# EAGLE board CAN Transceiver-Panel (EAGLE 9.0.1)
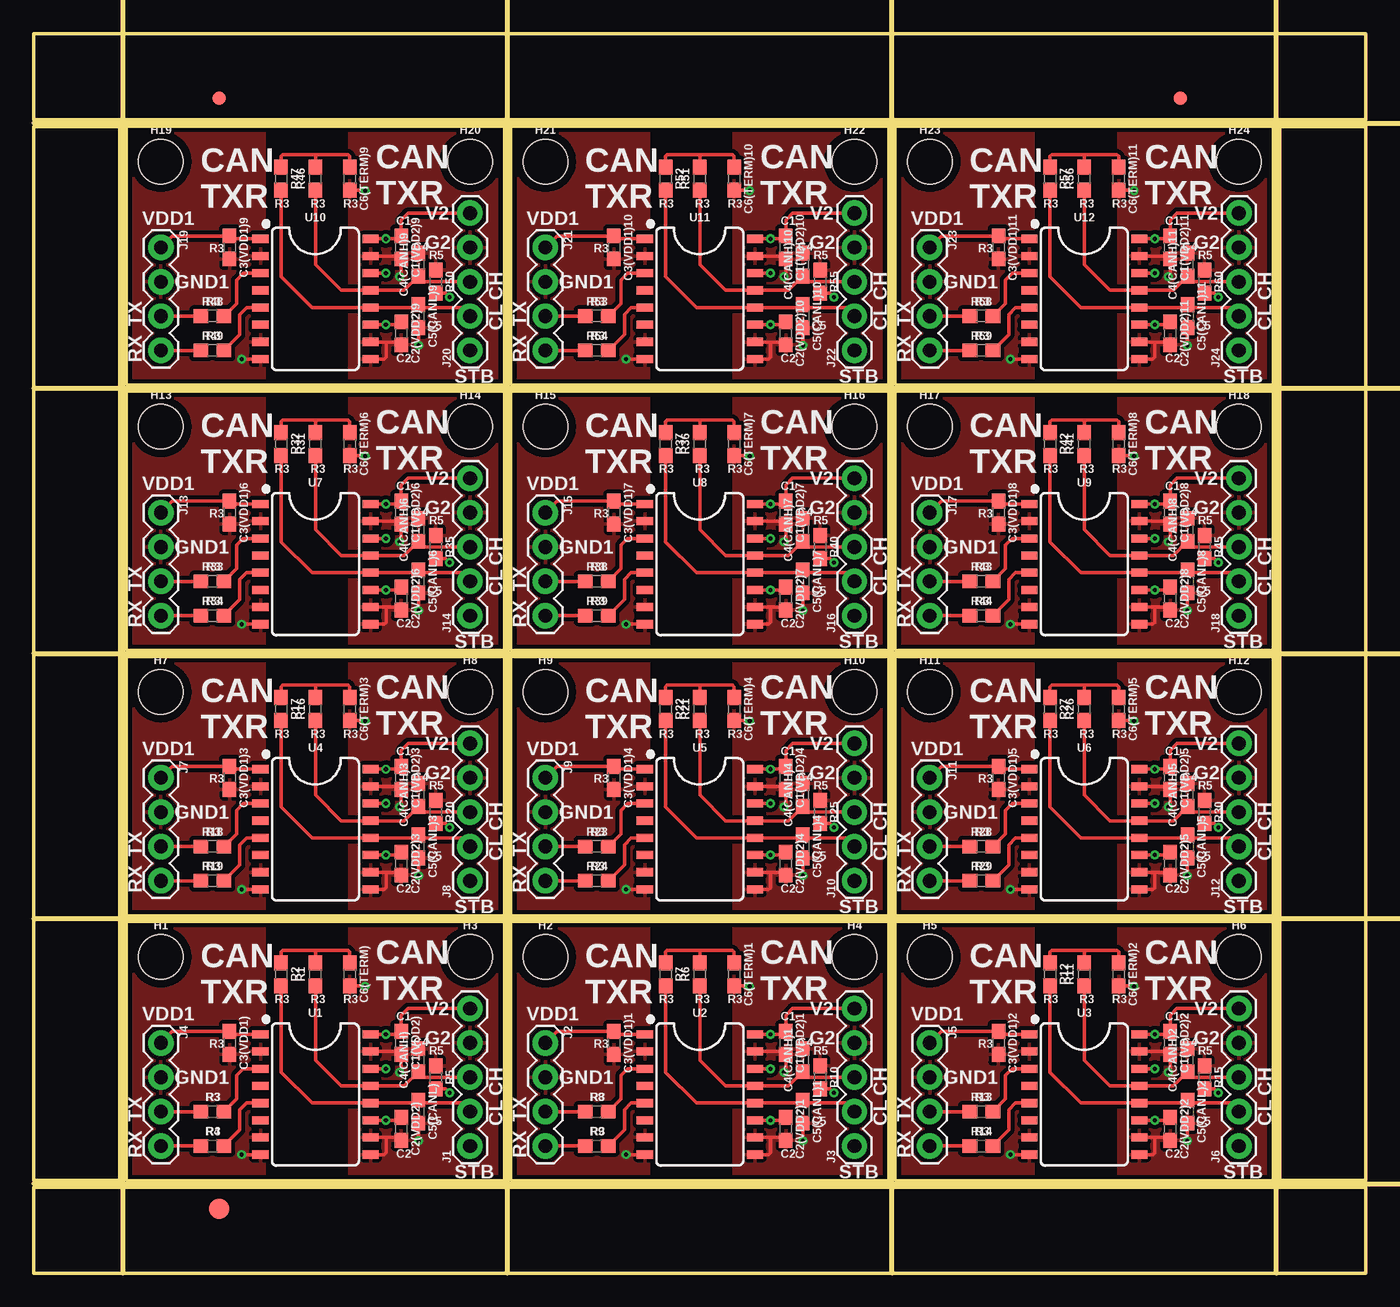
[diagram p0: board, top side]
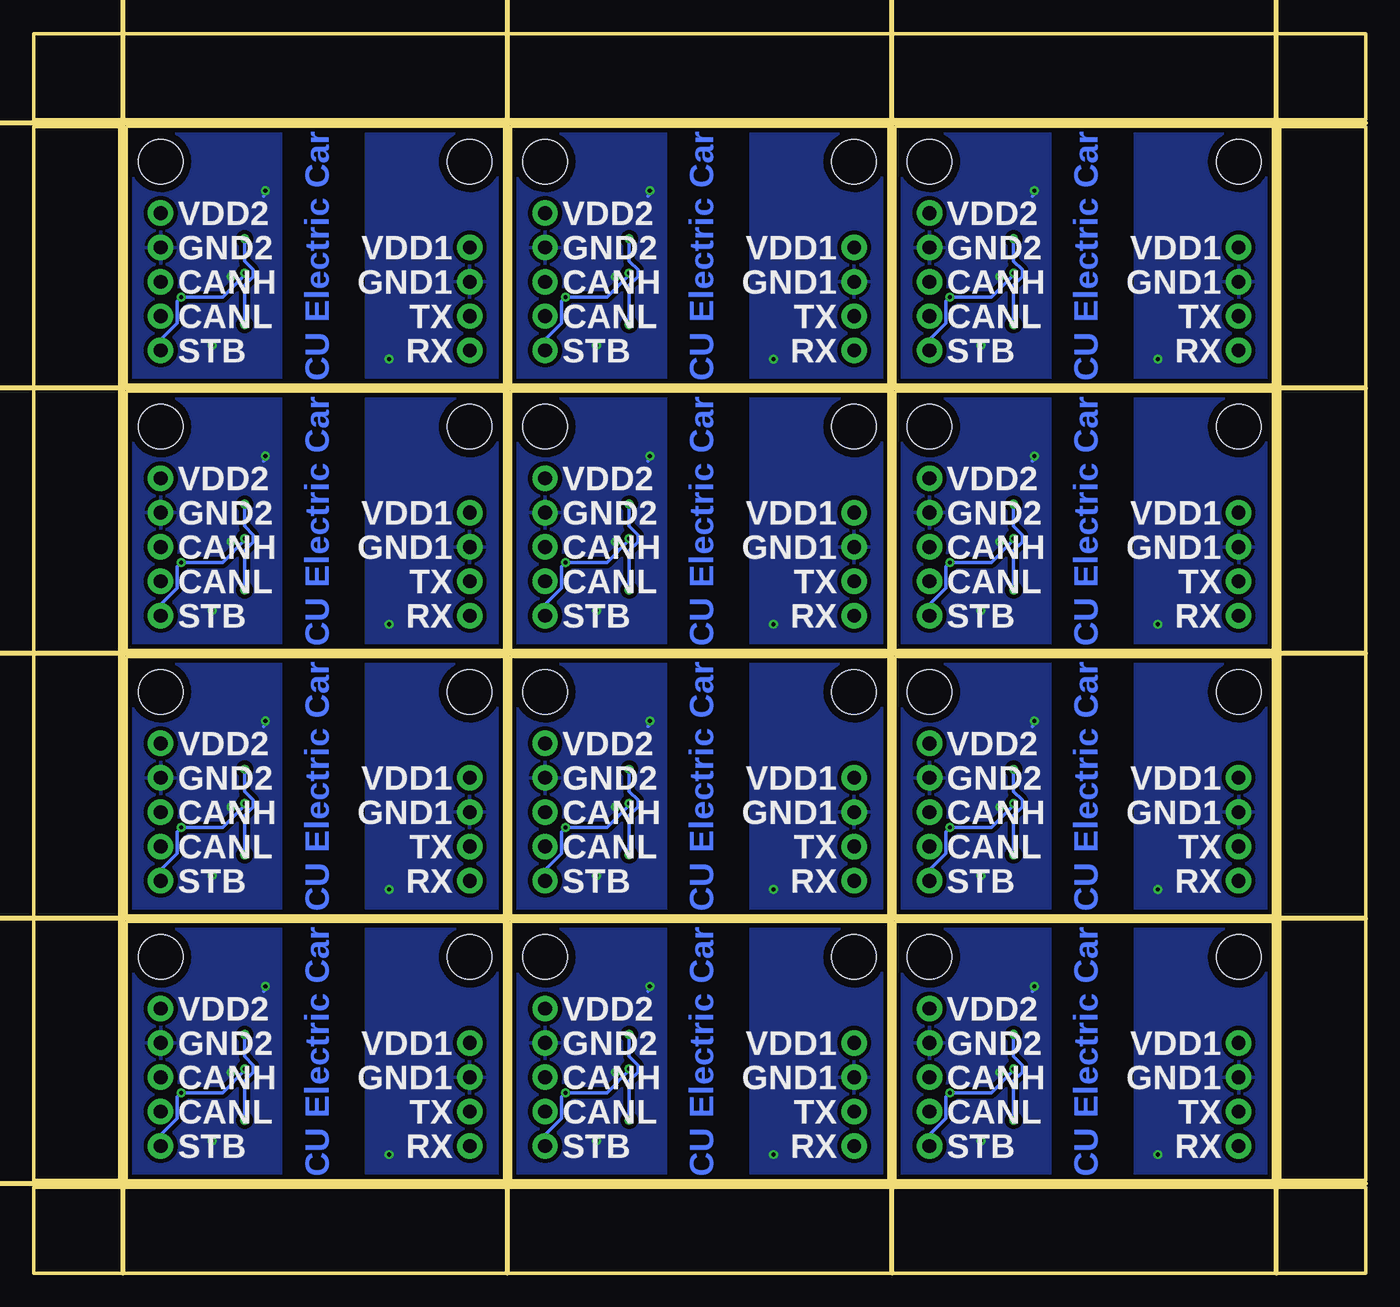
[diagram p1: board, bottom side, seen from below]

Size 98.49 x 91.64 mm. Coordinates in mm from the lower left corner, seen from the top.
Outline: 6.86,6.86 34.78,6.86 34.78,25.96 6.86,25.96 6.86,6.86
Outline: 35.29,6.86 63.21,6.86 63.21,25.96 35.29,25.96 35.29,6.86
Outline: 63.71,6.86 91.63,6.86 91.63,25.96 63.71,25.96 63.71,6.86
Outline: 6.86,26.47 34.78,26.47 34.78,45.57 6.86,45.57 6.86,26.47
Outline: 35.29,26.47 63.21,26.47 63.21,45.57 35.29,45.57 35.29,26.47
Outline: 63.71,26.47 91.63,26.47 91.63,45.57 63.71,45.57 63.71,26.47
Outline: 6.86,46.08 34.78,46.08 34.78,65.18 6.86,65.18 6.86,46.08
Outline: 35.29,46.08 63.21,46.08 63.21,65.18 35.29,65.18 35.29,46.08
Outline: 63.71,46.08 91.63,46.08 91.63,65.18 63.71,65.18 63.71,46.08
Outline: 6.86,65.69 34.78,65.69 34.78,84.79 6.86,84.79 6.86,65.69
Outline: 35.29,65.69 63.21,65.69 63.21,84.79 35.29,84.79 35.29,65.69
Outline: 63.71,65.69 91.63,65.69 91.63,84.79 63.71,84.79 63.71,65.69
Outline: 0,6.35 98.49,6.35 98.49,0 0,0 0,6.35
Outline: 92.14,84.79 98.49,84.79 98.49,6.86 92.14,6.86 92.14,84.79
Outline: 0,91.64 98.49,91.64 98.49,85.29 0,85.29 0,91.64
Outline: 0,84.79 6.35,84.79 6.35,6.86 0,6.86 0,84.79
Copper layers (1*16): Top 0.035mm / dielectric 1.5mm / Bottom 0.035mm
Design rules "SparkFun-2-layer-PCBWay-LIMIT": minimum track width 6mil, minimum drill 0.3mm, track to track 6mil, track to pad 6mil, pad to pad 6mil, via to via 6mil, smd to smd 6mil, copper to edge 6mil, drill to drill 6mil, minimum pad ring 7mil, minimum via ring 7mil, stop-mask expansion 4mil, vias tented up to drill 25mil, thermal gap 10mil
tRestrict: 24 lines
Milling: 9 lines

## Footprints (pad centres in the part's own frame; a part is rotated, then mirrored left to right if it is on the bottom)
0603 = smd 1.1 x 1: 1 -0.85,0; 2 0.85,0
FIDUCIAL-1X2 = smd 1 x 1: 1 0,0
FIDUCIAL-1.5X3 = smd 1.5 x 1.5: 1 0,0
STAND-OFF = hole 3.302: 0,0
1X05 = drill 1.016 pad 1.88: 1 0,0; 2 2.54,0; 3 5.08,0; 4 7.62,0; 5 10.16,0
1X04 = drill 1.016 pad 1.88: 1 0,0; 2 2.54,0; 3 5.08,0; 4 7.62,0
SO16 = smd 0.6 x 1.2: 1 -4.445,-4.07; 2 -3.175,-4.07; 3 -1.905,-4.07; 4 -0.635,-4.07; 5 0.635,-4.07; 6 1.905,-4.07; 7 3.175,-4.07; 8 4.445,-4.07; 9 4.445,4.07; 10 3.175,4.07; 11 1.905,4.07; 12 0.635,4.07; 13 -0.635,4.07; 14 -1.905,4.07; 15 -3.175,4.07; 16 -4.445,4.07

## Placement (x,y rotation side)
C1(VDD2)  0.1uF  [0603]  27.18,17.02 270 top
C1(VDD2)1  0.1uF  [0603]  55.61,17.02 270 top
C1(VDD2)2  0.1uF  [0603]  84.03,17.02 270 top
C1(VDD2)3  0.1uF  [0603]  27.18,36.63 270 top
C1(VDD2)4  0.1uF  [0603]  55.61,36.63 270 top
C1(VDD2)5  0.1uF  [0603]  84.03,36.63 270 top
C1(VDD2)6  0.1uF  [0603]  27.18,56.24 270 top
C1(VDD2)7  0.1uF  [0603]  55.61,56.24 270 top
C1(VDD2)8  0.1uF  [0603]  84.03,56.24 270 top
C1(VDD2)9  0.1uF  [0603]  27.18,75.85 270 top
C1(VDD2)10  0.1uF  [0603]  55.61,75.85 270 top
C1(VDD2)11  0.1uF  [0603]  84.03,75.85 270 top
C2(VDD2)  0.1uF  [0603]  27.18,10.67 270 top
C2(VDD2)1  0.1uF  [0603]  55.61,10.67 270 top
C2(VDD2)2  0.1uF  [0603]  84.03,10.67 270 top
C2(VDD2)3  0.1uF  [0603]  27.18,30.28 270 top
C2(VDD2)4  0.1uF  [0603]  55.61,30.28 270 top
C2(VDD2)5  0.1uF  [0603]  84.03,30.28 270 top
C2(VDD2)6  0.1uF  [0603]  27.18,49.89 270 top
C2(VDD2)7  0.1uF  [0603]  55.61,49.89 270 top
C2(VDD2)8  0.1uF  [0603]  84.03,49.89 270 top
C2(VDD2)9  0.1uF  [0603]  27.18,69.5 270 top
C2(VDD2)10  0.1uF  [0603]  55.61,69.5 270 top
C2(VDD2)11  0.1uF  [0603]  84.03,69.5 270 top
C3(VDD1)  0.1uF  [0603]  14.48,17.02 270 top
C3(VDD1)1  0.1uF  [0603]  42.91,17.02 270 top
C3(VDD1)2  0.1uF  [0603]  71.33,17.02 270 top
C3(VDD1)3  0.1uF  [0603]  14.48,36.63 270 top
C3(VDD1)4  0.1uF  [0603]  42.91,36.63 270 top
C3(VDD1)5  0.1uF  [0603]  71.33,36.63 270 top
C3(VDD1)6  0.1uF  [0603]  14.48,56.24 270 top
C3(VDD1)7  0.1uF  [0603]  42.91,56.24 270 top
C3(VDD1)8  0.1uF  [0603]  71.33,56.24 270 top
C3(VDD1)9  0.1uF  [0603]  14.48,75.85 270 top
C3(VDD1)10  0.1uF  [0603]  42.91,75.85 270 top
C3(VDD1)11  0.1uF  [0603]  71.33,75.85 270 top
C4(CANH)  63pF  [0603]  28.45,15.75 90 top
C4(CANH)1  63pF  [0603]  56.88,15.75 90 top
C4(CANH)2  63pF  [0603]  85.3,15.75 90 top
C4(CANH)3  63pF  [0603]  28.45,35.36 90 top
C4(CANH)4  63pF  [0603]  56.88,35.36 90 top
C4(CANH)5  63pF  [0603]  85.3,35.36 90 top
C4(CANH)6  63pF  [0603]  28.45,54.97 90 top
C4(CANH)7  63pF  [0603]  56.88,54.97 90 top
C4(CANH)8  63pF  [0603]  85.3,54.97 90 top
C4(CANH)9  63pF  [0603]  28.45,74.58 90 top
C4(CANH)10  63pF  [0603]  56.88,74.58 90 top
C4(CANH)11  63pF  [0603]  85.3,74.58 90 top
C5(CANL)  63pF  [0603]  28.45,11.94 270 top
C5(CANL)1  63pF  [0603]  56.88,11.94 270 top
C5(CANL)2  63pF  [0603]  85.3,11.94 270 top
C5(CANL)3  63pF  [0603]  28.45,31.55 270 top
C5(CANL)4  63pF  [0603]  56.88,31.55 270 top
C5(CANL)5  63pF  [0603]  85.3,31.55 270 top
C5(CANL)6  63pF  [0603]  28.45,51.16 270 top
C5(CANL)7  63pF  [0603]  56.88,51.16 270 top
C5(CANL)8  63pF  [0603]  85.3,51.16 270 top
C5(CANL)9  63pF  [0603]  28.45,70.77 270 top
C5(CANL)10  63pF  [0603]  56.88,70.77 270 top
C5(CANL)11  63pF  [0603]  85.3,70.77 270 top
C6(TERM)  4.7nF  [0603]  23.37,22.1 270 top
C6(TERM)1  4.7nF  [0603]  51.8,22.1 270 top
C6(TERM)2  4.7nF  [0603]  80.22,22.1 270 top
C6(TERM)3  4.7nF  [0603]  23.37,41.71 270 top
C6(TERM)4  4.7nF  [0603]  51.8,41.71 270 top
C6(TERM)5  4.7nF  [0603]  80.22,41.71 270 top
C6(TERM)6  4.7nF  [0603]  23.37,61.32 270 top
C6(TERM)7  4.7nF  [0603]  51.8,61.32 270 top
C6(TERM)8  4.7nF  [0603]  80.22,61.32 270 top
C6(TERM)9  4.7nF  [0603]  23.37,80.93 270 top
C6(TERM)10  4.7nF  [0603]  51.8,80.93 270 top
C6(TERM)11  4.7nF  [0603]  80.22,80.93 270 top
E$1  [FIDUCIAL-1X2]  13.72,86.88 0 top
E$2  [FIDUCIAL-1X2]  84.78,86.88 0 top
E$3  [FIDUCIAL-1.5X3]  13.72,4.76 0 top
H1  STAND-OFF  [STAND-OFF]  9.4,23.37 0 top
H2  STAND-OFF  [STAND-OFF]  37.83,23.37 0 top
H3  STAND-OFF  [STAND-OFF]  32.26,23.37 0 top
H4  STAND-OFF  [STAND-OFF]  60.69,23.37 0 top
H5  STAND-OFF  [STAND-OFF]  66.25,23.37 0 top
H6  STAND-OFF  [STAND-OFF]  89.11,23.37 0 top
H7  STAND-OFF  [STAND-OFF]  9.4,42.98 0 top
H8  STAND-OFF  [STAND-OFF]  32.26,42.98 0 top
H9  STAND-OFF  [STAND-OFF]  37.83,42.98 0 top
H10  STAND-OFF  [STAND-OFF]  60.69,42.98 0 top
H11  STAND-OFF  [STAND-OFF]  66.25,42.98 0 top
H12  STAND-OFF  [STAND-OFF]  89.11,42.98 0 top
H13  STAND-OFF  [STAND-OFF]  9.4,62.59 0 top
H14  STAND-OFF  [STAND-OFF]  32.26,62.59 0 top
H15  STAND-OFF  [STAND-OFF]  37.83,62.59 0 top
H16  STAND-OFF  [STAND-OFF]  60.69,62.59 0 top
H17  STAND-OFF  [STAND-OFF]  66.25,62.59 0 top
H18  STAND-OFF  [STAND-OFF]  89.11,62.59 0 top
H19  STAND-OFF  [STAND-OFF]  9.4,82.2 0 top
H20  STAND-OFF  [STAND-OFF]  32.26,82.2 0 top
H21  STAND-OFF  [STAND-OFF]  37.83,82.2 0 top
H22  STAND-OFF  [STAND-OFF]  60.69,82.2 0 top
H23  STAND-OFF  [STAND-OFF]  66.25,82.2 0 top
H24  STAND-OFF  [STAND-OFF]  89.11,82.2 0 top
J1  [1X05]  32.26,9.4 90 top
J2  [1X04]  37.83,17.02 270 top
J3  [1X05]  60.69,9.4 90 top
J4  [1X04]  9.4,17.02 270 top
J5  [1X04]  66.25,17.02 270 top
J6  [1X05]  89.11,9.4 90 top
J7  [1X04]  9.4,36.63 270 top
J8  [1X05]  32.26,29.01 90 top
J9  [1X04]  37.83,36.63 270 top
J10  [1X05]  60.69,29.01 90 top
J11  [1X04]  66.25,36.63 270 top
J12  [1X05]  89.11,29.01 90 top
J13  [1X04]  9.4,56.24 270 top
J14  [1X05]  32.26,48.62 90 top
J15  [1X04]  37.83,56.24 270 top
J16  [1X05]  60.69,48.62 90 top
J17  [1X04]  66.25,56.24 270 top
J18  [1X05]  89.11,48.62 90 top
J19  [1X04]  9.4,75.85 270 top
J20  [1X05]  32.26,68.23 90 top
J21  [1X04]  37.83,75.85 270 top
J22  [1X05]  60.69,68.23 90 top
J23  [1X04]  66.25,75.85 270 top
J24  [1X05]  89.11,68.23 90 top
R1  [0603]  20.83,22.1 90 top
R2  [0603]  18.29,22.1 270 top
R3  [0603]  13.21,11.94 0 top
R4  [0603]  13.21,9.4 0 top
R5  10k  [0603]  29.72,14.48 270 top
R6  [0603]  49.26,22.1 90 top
R7  [0603]  46.72,22.1 270 top
R8  [0603]  41.64,11.94 0 top
R9  [0603]  41.64,9.4 0 top
R10  10k  [0603]  58.15,14.48 270 top
R11  [0603]  77.68,22.1 90 top
R12  [0603]  75.14,22.1 270 top
R13  [0603]  70.06,11.94 0 top
R14  [0603]  70.06,9.4 0 top
R15  10k  [0603]  86.57,14.48 270 top
R16  [0603]  20.83,41.71 90 top
R17  [0603]  18.29,41.71 270 top
R18  [0603]  13.21,31.55 0 top
R19  [0603]  13.21,29.01 0 top
R20  10k  [0603]  29.72,34.09 270 top
R21  [0603]  49.26,41.71 90 top
R22  [0603]  46.72,41.71 270 top
R23  [0603]  41.64,31.55 0 top
R24  [0603]  41.64,29.01 0 top
R25  10k  [0603]  58.15,34.09 270 top
R26  [0603]  77.68,41.71 90 top
R27  [0603]  75.14,41.71 270 top
R28  [0603]  70.06,31.55 0 top
R29  [0603]  70.06,29.01 0 top
R30  10k  [0603]  86.57,34.09 270 top
R31  [0603]  20.83,61.32 90 top
R32  [0603]  18.29,61.32 270 top
R33  [0603]  13.21,51.16 0 top
R34  [0603]  13.21,48.62 0 top
R35  10k  [0603]  29.72,53.7 270 top
R36  [0603]  49.26,61.32 90 top
R37  [0603]  46.72,61.32 270 top
R38  [0603]  41.64,51.16 0 top
R39  [0603]  41.64,48.62 0 top
R40  10k  [0603]  58.15,53.7 270 top
R41  [0603]  77.68,61.32 90 top
R42  [0603]  75.14,61.32 270 top
R43  [0603]  70.06,51.16 0 top
R44  [0603]  70.06,48.62 0 top
R45  10k  [0603]  86.57,53.7 270 top
R46  [0603]  20.83,80.93 90 top
R47  [0603]  18.29,80.93 270 top
R48  [0603]  13.21,70.77 0 top
R49  [0603]  13.21,68.23 0 top
R50  10k  [0603]  29.72,73.31 270 top
R51  [0603]  49.26,80.93 90 top
R52  [0603]  46.72,80.93 270 top
R53  [0603]  41.64,70.77 0 top
R54  [0603]  41.64,68.23 0 top
R55  10k  [0603]  58.15,73.31 270 top
R56  [0603]  77.68,80.93 90 top
R57  [0603]  75.14,80.93 270 top
R58  [0603]  70.06,70.77 0 top
R59  [0603]  70.06,68.23 0 top
R60  10k  [0603]  86.57,73.31 270 top
U1  TJA1052I  [SO16]  20.83,13.21 270 top
U2  TJA1052I  [SO16]  49.26,13.21 270 top
U3  TJA1052I  [SO16]  77.68,13.21 270 top
U4  TJA1052I  [SO16]  20.83,32.82 270 top
U5  TJA1052I  [SO16]  49.26,32.82 270 top
U6  TJA1052I  [SO16]  77.68,32.82 270 top
U7  TJA1052I  [SO16]  20.83,52.43 270 top
U8  TJA1052I  [SO16]  49.26,52.43 270 top
U9  TJA1052I  [SO16]  77.68,52.43 270 top
U10  TJA1052I  [SO16]  20.83,72.04 270 top
U11  TJA1052I  [SO16]  49.26,72.04 270 top
U12  TJA1052I  [SO16]  77.68,72.04 270 top

## Library data of the parts
C1(VDD2) C1(VDD2)1-C1(VDD2)11 C2(VDD2) C2(VDD2)1-C2(VDD2)11 C3(VDD1) C3(VDD1)1-C3(VDD1)11 = SparkFun-Capacitors; PROD_ID: CAP-00810
C4(CANH) C4(CANH)1-C4(CANH)11 C5(CANL) C5(CANL)1-C5(CANL)11 C6(TERM) C6(TERM)1-C6(TERM)11 = SparkFun-Capacitors; PROD_ID: CAP-10986
E$1 E$2 = SparkFun-Aesthetics
E$3 = SparkFun-Retired
H1-H24 = SparkFun-Hardware
J1 J3 J6 J8 J10 J12 J14 J16 J18 J20 J22 J24 = SparkFun-Connectors
J2 J4 J5 J7 J9 J11 J13 J15 J17 J19 J21 J23 = SparkFun-Connectors; PROD_ID: CONN-09696
R1-R4 R6-R9 R11-R14 R16-R19 R21-R24 R26-R29 R31-R34 R36-R39 R41-R44 R46-R49 R51-R54 R56-R59 = SparkFun-Resistors
R5 R10 R15 R20 R25 R30 R35 R40 R45 R50 R55 R60 = SparkFun-Resistors; PROD_ID: RES-00824
U1-U12 = CU_Electric_Car

## Nets
CANH: C4(CANH).1 J1.3 R1.1 U1.13
CANH1: C4(CANH)1.1 J3.3 R6.1 U2.13
CANH2: C4(CANH)2.1 J6.3 R11.1 U3.13
CANH3: C4(CANH)3.1 J8.3 R16.1 U4.13
CANH4: C4(CANH)4.1 J10.3 R21.1 U5.13
CANH5: C4(CANH)5.1 J12.3 R26.1 U6.13
CANH6: C4(CANH)6.1 J14.3 R31.1 U7.13
CANH7: C4(CANH)7.1 J16.3 R36.1 U8.13
CANH8: C4(CANH)8.1 J18.3 R41.1 U9.13
CANH9: C4(CANH)9.1 J20.3 R46.1 U10.13
CANH10: C4(CANH)10.1 J22.3 R51.1 U11.13
CANH11: C4(CANH)11.1 J24.3 R56.1 U12.13
CANL: C5(CANL).1 J1.2 R2.2 U1.12
CANL1: C5(CANL)1.1 J3.2 R7.2 U2.12
CANL2: C5(CANL)2.1 J6.2 R12.2 U3.12
CANL3: C5(CANL)3.1 J8.2 R17.2 U4.12
CANL4: C5(CANL)4.1 J10.2 R22.2 U5.12
CANL5: C5(CANL)5.1 J12.2 R27.2 U6.12
CANL6: C5(CANL)6.1 J14.2 R32.2 U7.12
CANL7: C5(CANL)7.1 J16.2 R37.2 U8.12
CANL8: C5(CANL)8.1 J18.2 R42.2 U9.12
CANL9: C5(CANL)9.1 J20.2 R47.2 U10.12
CANL10: C5(CANL)10.1 J22.2 R52.2 U11.12
CANL11: C5(CANL)11.1 J24.2 R57.2 U12.12
GND1: C3(VDD1).2 J4.2 U1.2 U1.7 U1.8
GND2: C1(VDD2).2 C2(VDD2).2 C4(CANH).2 C5(CANL).2 C6(TERM).2 J1.4 R5.1 U1.9 U1.10 U1.15
GND3: C1(VDD2)1.2 C2(VDD2)1.2 C4(CANH)1.2 C5(CANL)1.2 C6(TERM)1.2 J3.4 R10.1 U2.9 U2.10 U2.15
GND4: C3(VDD1)1.2 J2.2 U2.2 U2.7 U2.8
GND5: C1(VDD2)2.2 C2(VDD2)2.2 C4(CANH)2.2 C5(CANL)2.2 C6(TERM)2.2 J6.4 R15.1 U3.9 U3.10 U3.15
GND6: C3(VDD1)2.2 J5.2 U3.2 U3.7 U3.8
GND7: C1(VDD2)3.2 C2(VDD2)3.2 C4(CANH)3.2 C5(CANL)3.2 C6(TERM)3.2 J8.4 R20.1 U4.9 U4.10 U4.15
GND8: C3(VDD1)3.2 J7.2 U4.2 U4.7 U4.8
GND9: C1(VDD2)4.2 C2(VDD2)4.2 C4(CANH)4.2 C5(CANL)4.2 C6(TERM)4.2 J10.4 R25.1 U5.9 U5.10 U5.15
GND10: C3(VDD1)4.2 J9.2 U5.2 U5.7 U5.8
GND11: C1(VDD2)5.2 C2(VDD2)5.2 C4(CANH)5.2 C5(CANL)5.2 C6(TERM)5.2 J12.4 R30.1 U6.9 U6.10 U6.15
GND12: C3(VDD1)5.2 J11.2 U6.2 U6.7 U6.8
GND13: C1(VDD2)6.2 C2(VDD2)6.2 C4(CANH)6.2 C5(CANL)6.2 C6(TERM)6.2 J14.4 R35.1 U7.9 U7.10 U7.15
GND14: C3(VDD1)6.2 J13.2 U7.2 U7.7 U7.8
GND15: C1(VDD2)7.2 C2(VDD2)7.2 C4(CANH)7.2 C5(CANL)7.2 C6(TERM)7.2 J16.4 R40.1 U8.9 U8.10 U8.15
GND16: C3(VDD1)7.2 J15.2 U8.2 U8.7 U8.8
GND17: C1(VDD2)8.2 C2(VDD2)8.2 C4(CANH)8.2 C5(CANL)8.2 C6(TERM)8.2 J18.4 R45.1 U9.9 U9.10 U9.15
GND18: C3(VDD1)8.2 J17.2 U9.2 U9.7 U9.8
GND19: C1(VDD2)9.2 C2(VDD2)9.2 C4(CANH)9.2 C5(CANL)9.2 C6(TERM)9.2 J20.4 R50.1 U10.9 U10.10 U10.15
GND20: C3(VDD1)9.2 J19.2 U10.2 U10.7 U10.8
GND21: C1(VDD2)10.2 C2(VDD2)10.2 C4(CANH)10.2 C5(CANL)10.2 C6(TERM)10.2 J22.4 R55.1 U11.9 U11.10 U11.15
GND22: C3(VDD1)10.2 J21.2 U11.2 U11.7 U11.8
GND23: C1(VDD2)11.2 C2(VDD2)11.2 C4(CANH)11.2 C5(CANL)11.2 C6(TERM)11.2 J24.4 R60.1 U12.9 U12.10 U12.15
GND24: C3(VDD1)11.2 J23.2 U12.2 U12.7 U12.8
N$1: R3.2 U1.3
N$2: R4.2 U1.5
N$3: C6(TERM).1 R1.2 R2.1
N$4: R8.2 U2.3
N$5: R9.2 U2.5
N$6: C6(TERM)1.1 R6.2 R7.1
N$7: R13.2 U3.3
N$8: R14.2 U3.5
N$9: C6(TERM)2.1 R11.2 R12.1
N$10: R18.2 U4.3
N$11: R19.2 U4.5
N$12: C6(TERM)3.1 R16.2 R17.1
N$13: R23.2 U5.3
N$14: R24.2 U5.5
N$15: C6(TERM)4.1 R21.2 R22.1
N$16: R28.2 U6.3
N$17: R29.2 U6.5
N$18: C6(TERM)5.1 R26.2 R27.1
N$19: R33.2 U7.3
N$20: R34.2 U7.5
N$21: C6(TERM)6.1 R31.2 R32.1
N$22: R38.2 U8.3
N$23: R39.2 U8.5
N$24: C6(TERM)7.1 R36.2 R37.1
N$25: R43.2 U9.3
N$26: R44.2 U9.5
N$27: C6(TERM)8.1 R41.2 R42.1
N$28: R48.2 U10.3
N$29: R49.2 U10.5
N$30: C6(TERM)9.1 R46.2 R47.1
N$31: R53.2 U11.3
N$32: R54.2 U11.5
N$33: C6(TERM)10.1 R51.2 R52.1
N$34: R58.2 U12.3
N$35: R59.2 U12.5
N$36: C6(TERM)11.1 R56.2 R57.1
RX: J4.4 R4.1
RX1: J2.4 R9.1
RX2: J5.4 R14.1
RX3: J7.4 R19.1
RX4: J9.4 R24.1
RX5: J11.4 R29.1
RX6: J13.4 R34.1
RX7: J15.4 R39.1
RX8: J17.4 R44.1
RX9: J19.4 R49.1
RX10: J21.4 R54.1
RX11: J23.4 R59.1
STB: J1.1 R5.2 U1.14
STB1: J3.1 R10.2 U2.14
STB2: J6.1 R15.2 U3.14
STB3: J8.1 R20.2 U4.14
STB4: J10.1 R25.2 U5.14
STB5: J12.1 R30.2 U6.14
STB6: J14.1 R35.2 U7.14
STB7: J16.1 R40.2 U8.14
STB8: J18.1 R45.2 U9.14
STB9: J20.1 R50.2 U10.14
STB10: J22.1 R55.2 U11.14
STB11: J24.1 R60.2 U12.14
TX: J4.3 R3.1
TX1: J2.3 R8.1
TX2: J5.3 R13.1
TX3: J7.3 R18.1
TX4: J9.3 R23.1
TX5: J11.3 R28.1
TX6: J13.3 R33.1
TX7: J15.3 R38.1
TX8: J17.3 R43.1
TX9: J19.3 R48.1
TX10: J21.3 R53.1
TX11: J23.3 R58.1
VCC_1: C3(VDD1).1 J4.1 U1.1
VCC_2: C1(VDD2).1 C2(VDD2).1 J1.5 U1.11 U1.16
VCC_3: C3(VDD1)1.1 J2.1 U2.1
VCC_4: C1(VDD2)1.1 C2(VDD2)1.1 J3.5 U2.11 U2.16
VCC_5: C3(VDD1)2.1 J5.1 U3.1
VCC_6: C1(VDD2)2.1 C2(VDD2)2.1 J6.5 U3.11 U3.16
VCC_7: C3(VDD1)3.1 J7.1 U4.1
VCC_8: C1(VDD2)3.1 C2(VDD2)3.1 J8.5 U4.11 U4.16
VCC_9: C3(VDD1)4.1 J9.1 U5.1
VCC_10: C1(VDD2)4.1 C2(VDD2)4.1 J10.5 U5.11 U5.16
VCC_11: C3(VDD1)5.1 J11.1 U6.1
VCC_12: C1(VDD2)5.1 C2(VDD2)5.1 J12.5 U6.11 U6.16
VCC_13: C3(VDD1)6.1 J13.1 U7.1
VCC_14: C1(VDD2)6.1 C2(VDD2)6.1 J14.5 U7.11 U7.16
VCC_15: C3(VDD1)7.1 J15.1 U8.1
VCC_16: C1(VDD2)7.1 C2(VDD2)7.1 J16.5 U8.11 U8.16
VCC_17: C3(VDD1)8.1 J17.1 U9.1
VCC_18: C1(VDD2)8.1 C2(VDD2)8.1 J18.5 U9.11 U9.16
VCC_19: C3(VDD1)9.1 J19.1 U10.1
VCC_20: C1(VDD2)9.1 C2(VDD2)9.1 J20.5 U10.11 U10.16
VCC_21: C3(VDD1)10.1 J21.1 U11.1
VCC_22: C1(VDD2)10.1 C2(VDD2)10.1 J22.5 U11.11 U11.16
VCC_23: C3(VDD1)11.1 J23.1 U12.1
VCC_24: C1(VDD2)11.1 C2(VDD2)11.1 J24.5 U12.11 U12.16

## Tracks (layer width: path | path; a pad name or v marks a point on that pad's centre or on a via)
CANH
  Top 0.254: R1.1 20.83,15.75 22.73,13.84 U1.13 27.39,13.84 C4(CANH).1 28.87,14.48 J1.3
CANH1
  Top 0.254: R6.1 49.26,15.75 51.16,13.84 U2.13 55.82,13.84 C4(CANH)1.1 57.3,14.48 J3.3
CANH2
  Top 0.254: R11.1 77.68,15.75 79.59,13.84 U3.13 84.25,13.84 C4(CANH)2.1 85.72,14.48 J6.3
CANH3
  Top 0.254: R16.1 20.83,35.36 22.73,33.45 U4.13 27.39,33.45 C4(CANH)3.1 28.87,34.09 J8.3
CANH4
  Top 0.254: R21.1 49.26,35.36 51.16,33.45 U5.13 55.82,33.45 C4(CANH)4.1 57.3,34.09 J10.3
CANH5
  Top 0.254: R26.1 77.68,35.36 79.59,33.45 U6.13 84.25,33.45 C4(CANH)5.1 85.72,34.09 J12.3
CANH6
  Top 0.254: R31.1 20.83,54.97 22.73,53.06 U7.13 27.39,53.06 C4(CANH)6.1 28.87,53.7 J14.3
CANH7
  Top 0.254: R36.1 49.26,54.97 51.16,53.06 U8.13 55.82,53.06 C4(CANH)7.1 57.3,53.7 J16.3
CANH8
  Top 0.254: R41.1 77.68,54.97 79.59,53.06 U9.13 84.25,53.06 C4(CANH)8.1 85.72,53.7 J18.3
CANH9
  Top 0.254: R46.1 20.83,74.58 22.73,72.67 U10.13 27.39,72.67 C4(CANH)9.1 28.87,73.31 J20.3
CANH10
  Top 0.254: R51.1 49.26,74.58 51.16,72.67 U11.13 55.82,72.67 C4(CANH)10.1 57.3,73.31 J22.3
CANH11
  Top 0.254: R56.1 77.68,74.58 79.59,72.67 U12.13 84.25,72.67 C4(CANH)11.1 85.72,73.31 J24.3
CANL
  Top 0.254: 28.23,12.57 U1.12 20.57,12.57 18.29,14.86 R2.2 | 28.23,12.57 C5(CANL).1 | J1.2 31.62,12.57 28.23,12.57
CANL1
  Top 0.254: 56.66,12.57 U2.12 49,12.57 46.72,14.86 R7.2 | 56.66,12.57 C5(CANL)1.1 | J3.2 60.05,12.57 56.66,12.57
CANL2
  Top 0.254: 85.09,12.57 U3.12 77.43,12.57 75.14,14.86 R12.2 | 85.09,12.57 C5(CANL)2.1 | J6.2 88.48,12.57 85.09,12.57
CANL3
  Top 0.254: 28.23,32.18 U4.12 20.57,32.18 18.29,34.47 R17.2 | 28.23,32.18 C5(CANL)3.1 | J8.2 31.62,32.18 28.23,32.18
CANL4
  Top 0.254: 56.66,32.18 U5.12 49,32.18 46.72,34.47 R22.2 | 56.66,32.18 C5(CANL)4.1 | J10.2 60.05,32.18 56.66,32.18
CANL5
  Top 0.254: 85.09,32.18 U6.12 77.43,32.18 75.14,34.47 R27.2 | 85.09,32.18 C5(CANL)5.1 | J12.2 88.48,32.18 85.09,32.18
CANL6
  Top 0.254: 28.23,51.79 U7.12 20.57,51.79 18.29,54.08 R32.2 | 28.23,51.79 C5(CANL)6.1 | J14.2 31.62,51.79 28.23,51.79
CANL7
  Top 0.254: 56.66,51.79 U8.12 49,51.79 46.72,54.08 R37.2 | 56.66,51.79 C5(CANL)7.1 | J16.2 60.05,51.79 56.66,51.79
CANL8
  Top 0.254: 85.09,51.79 U9.12 77.43,51.79 75.14,54.08 R42.2 | 85.09,51.79 C5(CANL)8.1 | J18.2 88.48,51.79 85.09,51.79
CANL9
  Top 0.254: 28.23,71.4 U10.12 20.57,71.4 18.29,73.69 R47.2 | 28.23,71.4 C5(CANL)9.1 | J20.2 31.62,71.4 28.23,71.4
CANL10
  Top 0.254: 56.66,71.4 U11.12 49,71.4 46.72,73.69 R52.2 | 56.66,71.4 C5(CANL)10.1 | J22.2 60.05,71.4 56.66,71.4
CANL11
  Top 0.254: 85.09,71.4 U12.12 77.43,71.4 75.14,73.69 R57.2 | 85.09,71.4 C5(CANL)11.1 | J24.2 88.48,71.4 85.09,71.4
GND1  (via drill 0.3)
  Top 0.254: U1.8 v15.37,8.76
  pour Top (isolate 0.305): 6.86,6.86 17.02,6.86 17.02,25.91 6.86,25.91
  pour Bottom (isolate 0.305): 6.86,6.86 17.02,6.86 17.02,25.91 6.86,25.91
GND2  (via drill 0.3)
  Top 0.254: U1.10 26.04,10.03 | 26.04,10.03 26.96,10.03 C2(VDD2).2 | U1.15 26.96,16.38 C1(VDD2).2 27.18,14.99 v27.05,14.86 | U1.9 25.91,8.76 26.04,8.89 26.04,10.03 | C6(TERM).2 24.47,21.25 v24.51,21.21 | C5(CANL).2 v28.45,9.78
  Bottom 0.254: v24.51,21.21 24.51,20.95 24.64,20.83
  pour Top (isolate 0.305): 23.37,25.91 23.37,6.86 34.8,6.86 34.8,25.91
  pour Bottom (isolate 0.305): 23.37,25.91 23.37,6.86 34.8,6.86 34.8,25.91
GND3  (via drill 0.3)
  Top 0.254: U2.10 54.46,10.03 | 54.46,10.03 55.39,10.03 C2(VDD2)1.2 | U2.15 55.39,16.38 C1(VDD2)1.2 55.61,14.99 v55.48,14.86 | U2.9 54.34,8.76 54.46,8.89 54.46,10.03 | C6(TERM)1.2 52.9,21.25 v52.94,21.21 | C5(CANL)1.2 v56.88,9.78
  Bottom 0.254: v52.94,21.21 52.94,20.95 53.07,20.83
  pour Top (isolate 0.305): 51.8,25.91 51.8,6.86 63.23,6.86 63.23,25.91
  pour Bottom (isolate 0.305): 51.8,25.91 51.8,6.86 63.23,6.86 63.23,25.91
GND4  (via drill 0.3)
  Top 0.254: U2.8 v43.79,8.76
  pour Top (isolate 0.305): 35.29,6.86 45.45,6.86 45.45,25.91 35.29,25.91
  pour Bottom (isolate 0.305): 35.29,6.86 45.45,6.86 45.45,25.91 35.29,25.91
GND5  (via drill 0.3)
  Top 0.254: U3.10 82.89,10.03 | 82.89,10.03 83.82,10.03 C2(VDD2)2.2 | U3.15 83.82,16.38 C1(VDD2)2.2 84.03,14.99 v83.91,14.86 | U3.9 82.76,8.76 82.89,8.89 82.89,10.03 | C6(TERM)2.2 81.33,21.25 v81.37,21.21 | C5(CANL)2.2 v85.3,9.78
  Bottom 0.254: v81.37,21.21 81.37,20.95 81.49,20.83
  pour Top (isolate 0.305): 80.22,25.91 80.22,6.86 91.65,6.86 91.65,25.91
  pour Bottom (isolate 0.305): 80.22,25.91 80.22,6.86 91.65,6.86 91.65,25.91
GND6  (via drill 0.3)
  Top 0.254: U3.8 v72.22,8.76
  pour Top (isolate 0.305): 63.71,6.86 73.87,6.86 73.87,25.91 63.71,25.91
  pour Bottom (isolate 0.305): 63.71,6.86 73.87,6.86 73.87,25.91 63.71,25.91
GND7  (via drill 0.3)
  Top 0.254: U4.10 26.04,29.64 | 26.04,29.64 26.96,29.64 C2(VDD2)3.2 | U4.15 26.96,35.99 C1(VDD2)3.2 27.18,34.59 v27.05,34.47 | U4.9 25.91,28.37 26.04,28.5 26.04,29.64 | C6(TERM)3.2 24.47,40.86 v24.51,40.82 | C5(CANL)3.2 v28.45,29.39
  Bottom 0.254: v24.51,40.82 24.51,40.56 24.64,40.44
  pour Top (isolate 0.305): 23.37,45.52 23.37,26.47 34.8,26.47 34.8,45.52
  pour Bottom (isolate 0.305): 23.37,45.52 23.37,26.47 34.8,26.47 34.8,45.52
GND8  (via drill 0.3)
  Top 0.254: U4.8 v15.37,28.37
  pour Top (isolate 0.305): 6.86,26.47 17.02,26.47 17.02,45.52 6.86,45.52
  pour Bottom (isolate 0.305): 6.86,26.47 17.02,26.47 17.02,45.52 6.86,45.52
GND9  (via drill 0.3)
  Top 0.254: U5.10 54.46,29.64 | 54.46,29.64 55.39,29.64 C2(VDD2)4.2 | U5.15 55.39,35.99 C1(VDD2)4.2 55.61,34.59 v55.48,34.47 | U5.9 54.34,28.37 54.46,28.5 54.46,29.64 | C6(TERM)4.2 52.9,40.86 v52.94,40.82 | C5(CANL)4.2 v56.88,29.39
  Bottom 0.254: v52.94,40.82 52.94,40.56 53.07,40.44
  pour Top (isolate 0.305): 51.8,45.52 51.8,26.47 63.23,26.47 63.23,45.52
  pour Bottom (isolate 0.305): 51.8,45.52 51.8,26.47 63.23,26.47 63.23,45.52
GND10  (via drill 0.3)
  Top 0.254: U5.8 v43.79,28.37
  pour Top (isolate 0.305): 35.29,26.47 45.45,26.47 45.45,45.52 35.29,45.52
  pour Bottom (isolate 0.305): 35.29,26.47 45.45,26.47 45.45,45.52 35.29,45.52
GND11  (via drill 0.3)
  Top 0.254: U6.10 82.89,29.64 | 82.89,29.64 83.82,29.64 C2(VDD2)5.2 | U6.15 83.82,35.99 C1(VDD2)5.2 84.03,34.59 v83.91,34.47 | U6.9 82.76,28.37 82.89,28.5 82.89,29.64 | C6(TERM)5.2 81.33,40.86 v81.37,40.82 | C5(CANL)5.2 v85.3,29.39
  Bottom 0.254: v81.37,40.82 81.37,40.56 81.49,40.44
  pour Top (isolate 0.305): 80.22,45.52 80.22,26.47 91.65,26.47 91.65,45.52
  pour Bottom (isolate 0.305): 80.22,45.52 80.22,26.47 91.65,26.47 91.65,45.52
GND12  (via drill 0.3)
  Top 0.254: U6.8 v72.22,28.37
  pour Top (isolate 0.305): 63.71,26.47 73.87,26.47 73.87,45.52 63.71,45.52
  pour Bottom (isolate 0.305): 63.71,26.47 73.87,26.47 73.87,45.52 63.71,45.52
GND13  (via drill 0.3)
  Top 0.254: U7.10 26.04,49.25 | 26.04,49.25 26.96,49.25 C2(VDD2)6.2 | U7.15 26.96,55.6 C1(VDD2)6.2 27.18,54.2 v27.05,54.08 | U7.9 25.91,47.98 26.04,48.11 26.04,49.25 | C6(TERM)6.2 24.47,60.47 v24.51,60.43 | C5(CANL)6.2 v28.45,49
  Bottom 0.254: v24.51,60.43 24.51,60.17 24.64,60.05
  pour Top (isolate 0.305): 23.37,65.13 23.37,46.08 34.8,46.08 34.8,65.13
  pour Bottom (isolate 0.305): 23.37,65.13 23.37,46.08 34.8,46.08 34.8,65.13
GND14  (via drill 0.3)
  Top 0.254: U7.8 v15.37,47.98
  pour Top (isolate 0.305): 6.86,46.08 17.02,46.08 17.02,65.13 6.86,65.13
  pour Bottom (isolate 0.305): 6.86,46.08 17.02,46.08 17.02,65.13 6.86,65.13
GND15  (via drill 0.3)
  Top 0.254: U8.10 54.46,49.25 | 54.46,49.25 55.39,49.25 C2(VDD2)7.2 | U8.15 55.39,55.6 C1(VDD2)7.2 55.61,54.2 v55.48,54.08 | U8.9 54.34,47.98 54.46,48.11 54.46,49.25 | C6(TERM)7.2 52.9,60.47 v52.94,60.43 | C5(CANL)7.2 v56.88,49
  Bottom 0.254: v52.94,60.43 52.94,60.17 53.07,60.05
  pour Top (isolate 0.305): 51.8,65.13 51.8,46.08 63.23,46.08 63.23,65.13
  pour Bottom (isolate 0.305): 51.8,65.13 51.8,46.08 63.23,46.08 63.23,65.13
GND16  (via drill 0.3)
  Top 0.254: U8.8 v43.79,47.98
  pour Top (isolate 0.305): 35.29,46.08 45.45,46.08 45.45,65.13 35.29,65.13
  pour Bottom (isolate 0.305): 35.29,46.08 45.45,46.08 45.45,65.13 35.29,65.13
GND17  (via drill 0.3)
  Top 0.254: U9.10 82.89,49.25 | 82.89,49.25 83.82,49.25 C2(VDD2)8.2 | U9.15 83.82,55.6 C1(VDD2)8.2 84.03,54.2 v83.91,54.08 | U9.9 82.76,47.98 82.89,48.11 82.89,49.25 | C6(TERM)8.2 81.33,60.47 v81.37,60.43 | C5(CANL)8.2 v85.3,49
  Bottom 0.254: v81.37,60.43 81.37,60.17 81.49,60.05
  pour Top (isolate 0.305): 80.22,65.13 80.22,46.08 91.65,46.08 91.65,65.13
  pour Bottom (isolate 0.305): 80.22,65.13 80.22,46.08 91.65,46.08 91.65,65.13
GND18  (via drill 0.3)
  Top 0.254: U9.8 v72.22,47.98
  pour Top (isolate 0.305): 63.71,46.08 73.87,46.08 73.87,65.13 63.71,65.13
  pour Bottom (isolate 0.305): 63.71,46.08 73.87,46.08 73.87,65.13 63.71,65.13
GND19  (via drill 0.3)
  Top 0.254: U10.10 26.04,68.86 | 26.04,68.86 26.96,68.86 C2(VDD2)9.2 | U10.15 26.96,75.21 C1(VDD2)9.2 27.18,73.81 v27.05,73.69 | U10.9 25.91,67.59 26.04,67.72 26.04,68.86 | C6(TERM)9.2 24.47,80.08 v24.51,80.04 | C5(CANL)9.2 v28.45,68.61
  Bottom 0.254: v24.51,80.04 24.51,79.78 24.64,79.66
  pour Top (isolate 0.305): 23.37,84.74 23.37,65.69 34.8,65.69 34.8,84.74
  pour Bottom (isolate 0.305): 23.37,84.74 23.37,65.69 34.8,65.69 34.8,84.74
GND20  (via drill 0.3)
  Top 0.254: U10.8 v15.37,67.59
  pour Top (isolate 0.305): 6.86,65.69 17.02,65.69 17.02,84.74 6.86,84.74
  pour Bottom (isolate 0.305): 6.86,65.69 17.02,65.69 17.02,84.74 6.86,84.74
GND21  (via drill 0.3)
  Top 0.254: U11.10 54.46,68.86 | 54.46,68.86 55.39,68.86 C2(VDD2)10.2 | U11.15 55.39,75.21 C1(VDD2)10.2 55.61,73.81 v55.48,73.69 | U11.9 54.34,67.59 54.46,67.72 54.46,68.86 | C6(TERM)10.2 52.9,80.08 v52.94,80.04 | C5(CANL)10.2 v56.88,68.61
  Bottom 0.254: v52.94,80.04 52.94,79.78 53.07,79.66
  pour Top (isolate 0.305): 51.8,84.74 51.8,65.69 63.23,65.69 63.23,84.74
  pour Bottom (isolate 0.305): 51.8,84.74 51.8,65.69 63.23,65.69 63.23,84.74
GND22  (via drill 0.3)
  Top 0.254: U11.8 v43.79,67.59
  pour Top (isolate 0.305): 35.29,65.69 45.45,65.69 45.45,84.74 35.29,84.74
  pour Bottom (isolate 0.305): 35.29,65.69 45.45,65.69 45.45,84.74 35.29,84.74
GND23  (via drill 0.3)
  Top 0.254: U12.10 82.89,68.86 | 82.89,68.86 83.82,68.86 C2(VDD2)11.2 | U12.15 83.82,75.21 C1(VDD2)11.2 84.03,73.81 v83.91,73.69 | U12.9 82.76,67.59 82.89,67.72 82.89,68.86 | C6(TERM)11.2 81.33,80.08 v81.37,80.04 | C5(CANL)11.2 v85.3,68.61
  Bottom 0.254: v81.37,80.04 81.37,79.78 81.49,79.66
  pour Top (isolate 0.305): 80.22,84.74 80.22,65.69 91.65,65.69 91.65,84.74
  pour Bottom (isolate 0.305): 80.22,84.74 80.22,65.69 91.65,65.69 91.65,84.74
GND24  (via drill 0.3)
  Top 0.254: U12.8 v72.22,67.59
  pour Top (isolate 0.305): 63.71,65.69 73.87,65.69 73.87,84.74 63.71,84.74
  pour Bottom (isolate 0.305): 63.71,65.69 73.87,65.69 73.87,84.74 63.71,84.74
N$1
  Top 0.254: U1.3 15.49,15.11 14.99,14.61 14.99,12.87 R3.2
N$2
  Top 0.254: R4.2 15.24,10.58 15.24,12.06 15.75,12.57 U1.5
N$3
  Top 0.254: R2.1 18.29,23.75 18.41,23.88 20.83,23.88 | 20.83,23.88 23.24,23.88 23.37,23.75 C6(TERM).1 | R1.2 20.83,23.88
N$4
  Top 0.254: U2.3 43.92,15.11 43.41,14.61 43.41,12.87 R8.2
N$5
  Top 0.254: R9.2 43.67,10.58 43.67,12.06 44.18,12.57 U2.5
N$6
  Top 0.254: R7.1 46.72,23.75 46.84,23.88 49.26,23.88 | 49.26,23.88 51.67,23.88 51.8,23.75 C6(TERM)1.1 | R6.2 49.26,23.88
N$7
  Top 0.254: U3.3 72.35,15.11 71.84,14.61 71.84,12.87 R13.2
N$8
  Top 0.254: R14.2 72.1,10.58 72.1,12.06 72.6,12.57 U3.5
N$9
  Top 0.254: R12.1 75.14,23.75 75.27,23.88 77.68,23.88 | 77.68,23.88 80.1,23.88 80.22,23.75 C6(TERM)2.1 | R11.2 77.68,23.88
N$10
  Top 0.254: U4.3 15.49,34.72 14.99,34.21 14.99,32.48 R18.2
N$11
  Top 0.254: R19.2 15.24,30.19 15.24,31.67 15.75,32.18 U4.5
N$12
  Top 0.254: R17.1 18.29,43.36 18.41,43.48 20.83,43.48 | 20.83,43.48 23.24,43.48 23.37,43.36 C6(TERM)3.1 | R16.2 20.83,43.48
N$13
  Top 0.254: U5.3 43.92,34.72 43.41,34.21 43.41,32.48 R23.2
N$14
  Top 0.254: R24.2 43.67,30.19 43.67,31.67 44.18,32.18 U5.5
N$15
  Top 0.254: R22.1 46.72,43.36 46.84,43.48 49.26,43.48 | 49.26,43.48 51.67,43.48 51.8,43.36 C6(TERM)4.1 | R21.2 49.26,43.48
N$16
  Top 0.254: U6.3 72.35,34.72 71.84,34.21 71.84,32.48 R28.2
N$17
  Top 0.254: R29.2 72.1,30.19 72.1,31.67 72.6,32.18 U6.5
N$18
  Top 0.254: R27.1 75.14,43.36 75.27,43.48 77.68,43.48 | 77.68,43.48 80.1,43.48 80.22,43.36 C6(TERM)5.1 | R26.2 77.68,43.48
N$19
  Top 0.254: U7.3 15.49,54.33 14.99,53.82 14.99,52.08 R33.2
N$20
  Top 0.254: R34.2 15.24,49.8 15.24,51.28 15.75,51.79 U7.5
N$21
  Top 0.254: R32.1 18.29,62.97 18.41,63.09 20.83,63.09 | 20.83,63.09 23.24,63.09 23.37,62.97 C6(TERM)6.1 | R31.2 20.83,63.09
N$22
  Top 0.254: U8.3 43.92,54.33 43.41,53.82 43.41,52.08 R38.2
N$23
  Top 0.254: R39.2 43.67,49.8 43.67,51.28 44.18,51.79 U8.5
N$24
  Top 0.254: R37.1 46.72,62.97 46.84,63.09 49.26,63.09 | 49.26,63.09 51.67,63.09 51.8,62.97 C6(TERM)7.1 | R36.2 49.26,63.09
N$25
  Top 0.254: U9.3 72.35,54.33 71.84,53.82 71.84,52.08 R43.2
N$26
  Top 0.254: R44.2 72.1,49.8 72.1,51.28 72.6,51.79 U9.5
N$27
  Top 0.254: R42.1 75.14,62.97 75.27,63.09 77.68,63.09 | 77.68,63.09 80.1,63.09 80.22,62.97 C6(TERM)8.1 | R41.2 77.68,63.09
N$28
  Top 0.254: U10.3 15.49,73.94 14.99,73.43 14.99,71.69 R48.2
N$29
  Top 0.254: R49.2 15.24,69.41 15.24,70.89 15.75,71.4 U10.5
N$30
  Top 0.254: R47.1 18.29,82.58 18.41,82.7 20.83,82.7 | 20.83,82.7 23.24,82.7 23.37,82.58 C6(TERM)9.1 | R46.2 20.83,82.7
N$31
  Top 0.254: U11.3 43.92,73.94 43.41,73.43 43.41,71.69 R53.2
N$32
  Top 0.254: R54.2 43.67,69.41 43.67,70.89 44.18,71.4 U11.5
N$33
  Top 0.254: R52.1 46.72,82.58 46.84,82.7 49.26,82.7 | 49.26,82.7 51.67,82.7 51.8,82.58 C6(TERM)10.1 | R51.2 49.26,82.7
N$34
  Top 0.254: U12.3 72.35,73.94 71.84,73.43 71.84,71.69 R58.2
N$35
  Top 0.254: R59.2 72.1,69.41 72.1,70.89 72.6,71.4 U12.5
N$36
  Top 0.254: R57.1 75.14,82.58 75.27,82.7 77.68,82.7 | 77.68,82.7 80.1,82.7 80.22,82.58 C6(TERM)11.1 | R56.2 77.68,82.7
RX
  Top 0.254: R4.1 J4.4
RX1
  Top 0.254: R9.1 J2.4
RX2
  Top 0.254: R14.1 J5.4
RX3
  Top 0.254: R19.1 J7.4
RX4
  Top 0.254: R24.1 J9.4
RX5
  Top 0.254: R29.1 J11.4
RX6
  Top 0.254: R34.1 J13.4
RX7
  Top 0.254: R39.1 J15.4
RX8
  Top 0.254: R44.1 J17.4
RX9
  Top 0.254: R49.1 J19.4
RX10
  Top 0.254: R54.1 J21.4
RX11
  Top 0.254: R59.1 J23.4
STB  (via drill 0.3)
  Top 0.254: R5.2 30.44,13.63 v30.73,13.34 | U1.14 v26.04,15.11
  Bottom 0.254: J1.1 32.26,10.21 31.04,11.43 31.04,13.03 v30.73,13.34 27.68,13.34 26.04,14.98 v26.04,15.11
STB1  (via drill 0.3)
  Top 0.254: R10.2 58.87,13.63 v59.16,13.34 | U2.14 v54.46,15.11
  Bottom 0.254: J3.1 60.69,10.21 59.47,11.43 59.47,13.03 v59.16,13.34 56.1,13.34 54.46,14.98 v54.46,15.11
STB2  (via drill 0.3)
  Top 0.254: R15.2 87.3,13.63 v87.59,13.34 | U3.14 v82.89,15.11
  Bottom 0.254: J6.1 89.11,10.21 87.9,11.43 87.9,13.03 v87.59,13.34 84.53,13.34 82.89,14.98 v82.89,15.11
STB3  (via drill 0.3)
  Top 0.254: R20.2 30.44,33.24 v30.73,32.94 | U4.14 v26.04,34.72
  Bottom 0.254: J8.1 32.26,29.82 31.04,31.04 31.04,32.64 v30.73,32.94 27.68,32.94 26.04,34.59 v26.04,34.72
STB4  (via drill 0.3)
  Top 0.254: R25.2 58.87,33.24 v59.16,32.94 | U5.14 v54.46,34.72
  Bottom 0.254: J10.1 60.69,29.82 59.47,31.04 59.47,32.64 v59.16,32.94 56.1,32.94 54.46,34.59 v54.46,34.72
STB5  (via drill 0.3)
  Top 0.254: R30.2 87.3,33.24 v87.59,32.94 | U6.14 v82.89,34.72
  Bottom 0.254: J12.1 89.11,29.82 87.9,31.04 87.9,32.64 v87.59,32.94 84.53,32.94 82.89,34.59 v82.89,34.72
STB6  (via drill 0.3)
  Top 0.254: R35.2 30.44,52.85 v30.73,52.55 | U7.14 v26.04,54.33
  Bottom 0.254: J14.1 32.26,49.43 31.04,50.65 31.04,52.25 v30.73,52.55 27.68,52.55 26.04,54.2 v26.04,54.33
STB7  (via drill 0.3)
  Top 0.254: R40.2 58.87,52.85 v59.16,52.55 | U8.14 v54.46,54.33
  Bottom 0.254: J16.1 60.69,49.43 59.47,50.65 59.47,52.25 v59.16,52.55 56.1,52.55 54.46,54.2 v54.46,54.33
STB8  (via drill 0.3)
  Top 0.254: R45.2 87.3,52.85 v87.59,52.55 | U9.14 v82.89,54.33
  Bottom 0.254: J18.1 89.11,49.43 87.9,50.65 87.9,52.25 v87.59,52.55 84.53,52.55 82.89,54.2 v82.89,54.33
STB9  (via drill 0.3)
  Top 0.254: R50.2 30.44,72.45 v30.73,72.16 | U10.14 v26.04,73.94
  Bottom 0.254: J20.1 32.26,69.04 31.04,70.26 31.04,71.86 v30.73,72.16 27.68,72.16 26.04,73.8 v26.04,73.94
STB10  (via drill 0.3)
  Top 0.254: R55.2 58.87,72.45 v59.16,72.16 | U11.14 v54.46,73.94
  Bottom 0.254: J22.1 60.69,69.04 59.47,70.26 59.47,71.86 v59.16,72.16 56.1,72.16 54.46,73.8 v54.46,73.94
STB11  (via drill 0.3)
  Top 0.254: R60.2 87.3,72.45 v87.59,72.16 | U12.14 v82.89,73.94
  Bottom 0.254: J24.1 89.11,69.04 87.9,70.26 87.9,71.86 v87.59,72.16 84.53,72.16 82.89,73.8 v82.89,73.94
TX
  Top 0.254: R3.1 J4.3
TX1
  Top 0.254: R8.1 J2.3
TX2
  Top 0.254: R13.1 J5.3
TX3
  Top 0.254: R18.1 J7.3
TX4
  Top 0.254: R23.1 J9.3
TX5
  Top 0.254: R28.1 J11.3
TX6
  Top 0.254: R33.1 J13.3
TX7
  Top 0.254: R38.1 J15.3
TX8
  Top 0.254: R43.1 J17.3
TX9
  Top 0.254: R48.1 J19.3
TX10
  Top 0.254: R53.1 J21.3
TX11
  Top 0.254: R58.1 J23.3
VCC_1
  Top 0.254: J4.1 10.25,17.87 C3(VDD1).1 14.69,17.65 U1.1
VCC_2  (via drill 0.3)
  Top 0.254: U1.16 v26.04,17.65 26.96,17.65 C1(VDD2).1 27.18,19.05 27.69,19.56 J1.5 | C2(VDD2).1 26.96,11.3 v26.04,11.3 U1.11
  Bottom 0.254: v26.04,17.65 26.04,16.01 25.4,15.38 25.4,14.85 26.04,14.21 v26.04,11.3
VCC_3
  Top 0.254: J2.1 38.68,17.87 C3(VDD1)1.1 43.12,17.65 U2.1
VCC_4  (via drill 0.3)
  Top 0.254: U2.16 v54.46,17.65 55.39,17.65 C1(VDD2)1.1 55.61,19.05 56.11,19.56 J3.5 | C2(VDD2)1.1 55.39,11.3 v54.46,11.3 U2.11
  Bottom 0.254: v54.46,17.65 54.46,16.01 53.83,15.38 53.83,14.85 54.46,14.21 v54.46,11.3
VCC_5
  Top 0.254: J5.1 67.1,17.87 C3(VDD1)2.1 71.55,17.65 U3.1
VCC_6  (via drill 0.3)
  Top 0.254: U3.16 v82.89,17.65 83.82,17.65 C1(VDD2)2.1 84.03,19.05 84.54,19.56 J6.5 | C2(VDD2)2.1 83.82,11.3 v82.89,11.3 U3.11
  Bottom 0.254: v82.89,17.65 82.89,16.01 82.26,15.38 82.26,14.85 82.89,14.21 v82.89,11.3
VCC_7
  Top 0.254: J7.1 10.25,37.48 C3(VDD1)3.1 14.69,37.26 U4.1
VCC_8  (via drill 0.3)
  Top 0.254: U4.16 v26.04,37.26 26.96,37.26 C1(VDD2)3.1 27.18,38.66 27.69,39.17 J8.5 | C2(VDD2)3.1 26.96,30.91 v26.04,30.91 U4.11
  Bottom 0.254: v26.04,37.26 26.04,35.62 25.4,34.98 25.4,34.46 26.04,33.82 v26.04,30.91
VCC_9
  Top 0.254: J9.1 38.68,37.48 C3(VDD1)4.1 43.12,37.26 U5.1
VCC_10  (via drill 0.3)
  Top 0.254: U5.16 v54.46,37.26 55.39,37.26 C1(VDD2)4.1 55.61,38.66 56.11,39.17 J10.5 | C2(VDD2)4.1 55.39,30.91 v54.46,30.91 U5.11
  Bottom 0.254: v54.46,37.26 54.46,35.62 53.83,34.98 53.83,34.46 54.46,33.82 v54.46,30.91
VCC_11
  Top 0.254: J11.1 67.1,37.48 C3(VDD1)5.1 71.55,37.26 U6.1
VCC_12  (via drill 0.3)
  Top 0.254: U6.16 v82.89,37.26 83.82,37.26 C1(VDD2)5.1 84.03,38.66 84.54,39.17 J12.5 | C2(VDD2)5.1 83.82,30.91 v82.89,30.91 U6.11
  Bottom 0.254: v82.89,37.26 82.89,35.62 82.26,34.98 82.26,34.46 82.89,33.82 v82.89,30.91
VCC_13
  Top 0.254: J13.1 10.25,57.09 C3(VDD1)6.1 14.69,56.87 U7.1
VCC_14  (via drill 0.3)
  Top 0.254: U7.16 v26.04,56.87 26.96,56.87 C1(VDD2)6.1 27.18,58.27 27.69,58.78 J14.5 | C2(VDD2)6.1 26.96,50.52 v26.04,50.52 U7.11
  Bottom 0.254: v26.04,56.87 26.04,55.23 25.4,54.59 25.4,54.07 26.04,53.43 v26.04,50.52
VCC_15
  Top 0.254: J15.1 38.68,57.09 C3(VDD1)7.1 43.12,56.87 U8.1
VCC_16  (via drill 0.3)
  Top 0.254: U8.16 v54.46,56.87 55.39,56.87 C1(VDD2)7.1 55.61,58.27 56.11,58.78 J16.5 | C2(VDD2)7.1 55.39,50.52 v54.46,50.52 U8.11
  Bottom 0.254: v54.46,56.87 54.46,55.23 53.83,54.59 53.83,54.07 54.46,53.43 v54.46,50.52
VCC_17
  Top 0.254: J17.1 67.1,57.09 C3(VDD1)8.1 71.55,56.87 U9.1
VCC_18  (via drill 0.3)
  Top 0.254: U9.16 v82.89,56.87 83.82,56.87 C1(VDD2)8.1 84.03,58.27 84.54,58.78 J18.5 | C2(VDD2)8.1 83.82,50.52 v82.89,50.52 U9.11
  Bottom 0.254: v82.89,56.87 82.89,55.23 82.26,54.59 82.26,54.07 82.89,53.43 v82.89,50.52
VCC_19
  Top 0.254: J19.1 10.25,76.7 C3(VDD1)9.1 14.69,76.48 U10.1
VCC_20  (via drill 0.3)
  Top 0.254: U10.16 v26.04,76.48 26.96,76.48 C1(VDD2)9.1 27.18,77.88 27.69,78.39 J20.5 | C2(VDD2)9.1 26.96,70.13 v26.04,70.13 U10.11
  Bottom 0.254: v26.04,76.48 26.04,74.84 25.4,74.2 25.4,73.68 26.04,73.04 v26.04,70.13
VCC_21
  Top 0.254: J21.1 38.68,76.7 C3(VDD1)10.1 43.12,76.48 U11.1
VCC_22  (via drill 0.3)
  Top 0.254: U11.16 v54.46,76.48 55.39,76.48 C1(VDD2)10.1 55.61,77.88 56.11,78.39 J22.5 | C2(VDD2)10.1 55.39,70.13 v54.46,70.13 U11.11
  Bottom 0.254: v54.46,76.48 54.46,74.84 53.83,74.2 53.83,73.68 54.46,73.04 v54.46,70.13
VCC_23
  Top 0.254: J23.1 67.1,76.7 C3(VDD1)11.1 71.55,76.48 U12.1
VCC_24  (via drill 0.3)
  Top 0.254: U12.16 v82.89,76.48 83.82,76.48 C1(VDD2)11.1 84.03,77.88 84.54,78.39 J24.5 | C2(VDD2)11.1 83.82,70.13 v82.89,70.13 U12.11
  Bottom 0.254: v82.89,76.48 82.89,74.84 82.26,74.2 82.26,73.68 82.89,73.04 v82.89,70.13

## Text on the board
Bottom: CU Electric Car | CU Electric Car | CU Electric Car | CU Electric Car | CU Electric Car | CU Electric Car | CU Electric Car | CU Electric Car | CU Electric Car | CU Electric Car | CU Electric Car | CU Electric Car
tPlace: CAN / TXR | R3 | R3 | R3 | CAN / TXR | V2 | CAN / TXR | R3 | R3 | R3 | CAN / TXR | V2 | CAN / TXR | R3 | R3 | R3 | CAN / TXR | V2 | VDD1 | C1 | VDD1 | C1 | VDD1 | C1 | G2 | G2 | G2 | R3 | C4 | R3 | C4 | R3 | C4 | R5 | R5 | R5 | GND1 | CH | GND1 | CH | GND1 | CH | R3 | CL | R3 | CL | R3 | CL | TX | C5 | TX | C5 | TX | C5 | R3 | R3 | R3 | RX | C2 | RX | C2 | RX | C2 | STB | STB | STB | CAN / TXR | CAN / TXR | CAN / TXR | CAN / TXR | R3 | R3 | R3 | V2 | CAN / TXR | R3 | R3 | R3 | V2 | CAN / TXR | R3 | R3 | R3 | V2 | VDD1 | C1 | VDD1 | C1 | VDD1 | C1 | G2 | G2 | G2 | R3 | C4 | R3 | C4 | R3 | C4 | R5 | CH | R5 | CH | R5 | CH | GND1 | GND1 | GND1 | R3 | CL | R3 | CL | R3 | CL | TX | TX | TX | R3 | C5 | R3 | C5 | R3 | C5 | RX | C2 | RX | C2 | RX | C2 | STB | STB | STB | CAN / TXR | R3 | R3 | R3 | CAN / TXR | V2 | CAN / TXR | R3 | R3 | R3 | CAN / TXR | V2 | CAN / TXR | R3 | R3 | R3 | CAN / TXR | V2 | VDD1 | C1 | G2 | VDD1 | C1 | G2 | VDD1 | C1 | G2 | C4 | C4 | C4 | R3 | R5 | R3 | R5 | R3 | R5 | GND1 | CH | GND1 | CH | GND1 | CH | CL | CL | CL | R3 | R3 | R3 | TX | C5 | TX | C5 | TX | C5 | R3 | R3 | R3 | RX | C2 | RX | C2 | RX | C2 | STB | STB | STB | CAN / TXR | R3 | R3 | R3 | CAN / TXR | V2 | CAN / TXR | R3 | R3 | R3 | CAN / TXR | V2 | CAN / TXR | R3 | R3 | R3 | CAN / TXR | V2 | VDD1 | C1 | VDD1 | C1 | VDD1 | C1 | G2 | G2 | G2 | R3 | C4 | R3 | C4 | R3 | C4 | R5 | R5 | R5 | GND1 | CH | GND1 | CH | GND1 | CH | R3 | CL | R3 | CL | R3 | CL | TX | C5 | TX | C5 | TX | C5 | R3 | R3 | R3 | RX | C2 | RX | C2 | RX | C2 | STB | STB | STB
bPlace: VDD2 | VDD2 | VDD2 | VDD1 | GND2 | VDD1 | GND2 | VDD1 | GND2 | GND1 | CANH | GND1 | CANH | GND1 | CANH | TX | CANL | TX | CANL | TX | CANL | RX | STB | RX | STB | RX | STB | VDD2 | VDD2 | VDD2 | VDD1 | GND2 | VDD1 | GND2 | VDD1 | GND2 | GND1 | CANH | GND1 | CANH | GND1 | CANH | TX | CANL | TX | CANL | TX | CANL | RX | STB | RX | STB | RX | STB | VDD2 | VDD2 | VDD2 | VDD1 | GND2 | VDD1 | GND2 | VDD1 | GND2 | GND1 | CANH | GND1 | CANH | GND1 | CANH | TX | CANL | TX | CANL | TX | CANL | RX | STB | RX | STB | RX | STB | VDD2 | VDD2 | VDD2 | VDD1 | GND2 | VDD1 | GND2 | VDD1 | GND2 | GND1 | CANH | GND1 | CANH | GND1 | CANH | TX | CANL | TX | CANL | TX | CANL | RX | STB | RX | STB | RX | STB
Milling: v-score | v-score | v-score | v-score | v-score | v-score | v-score | v-score | v-score